# EAGLE board project_vostok_(tv_b_gone_extended) (EAGLE 8.5.0)
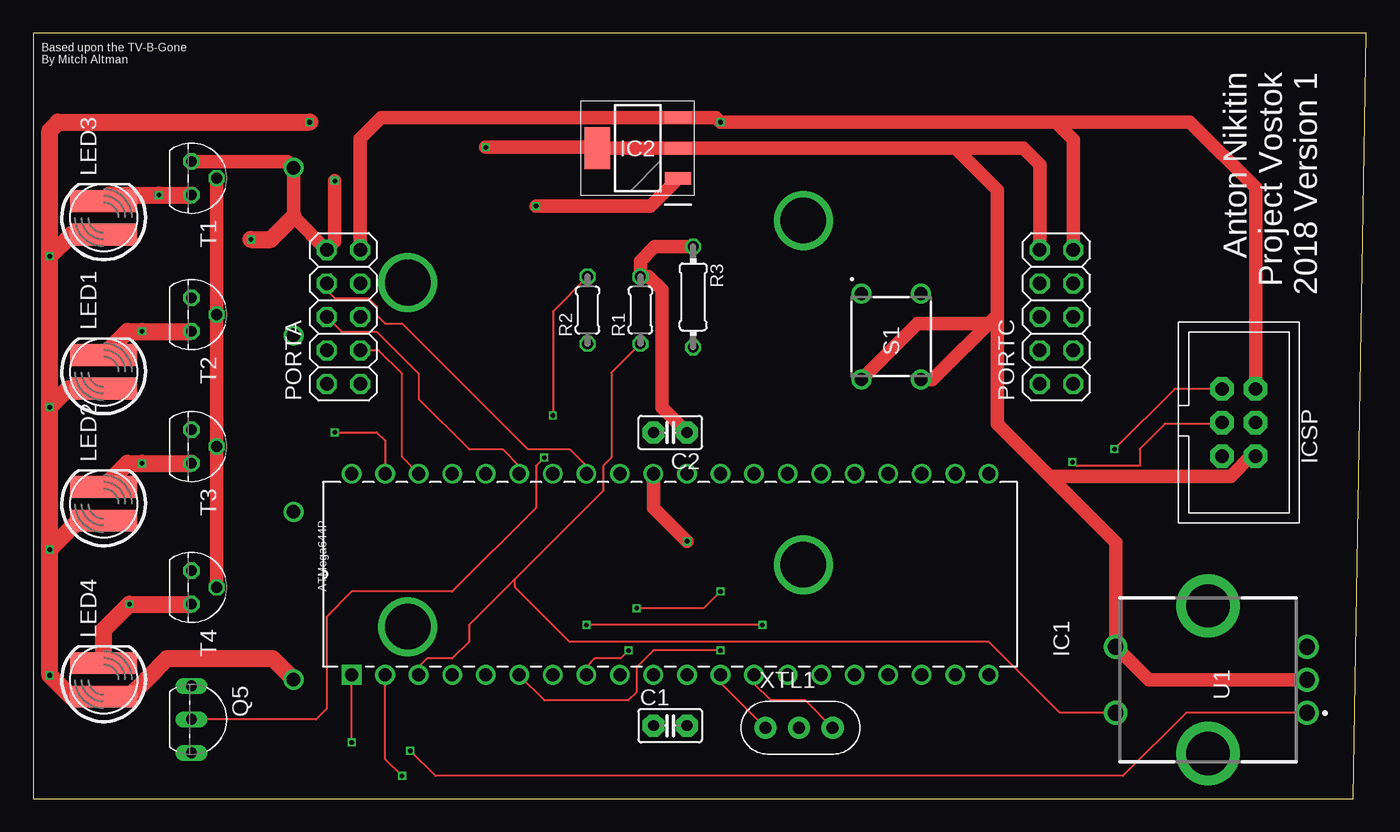
[diagram p0: board, top side]
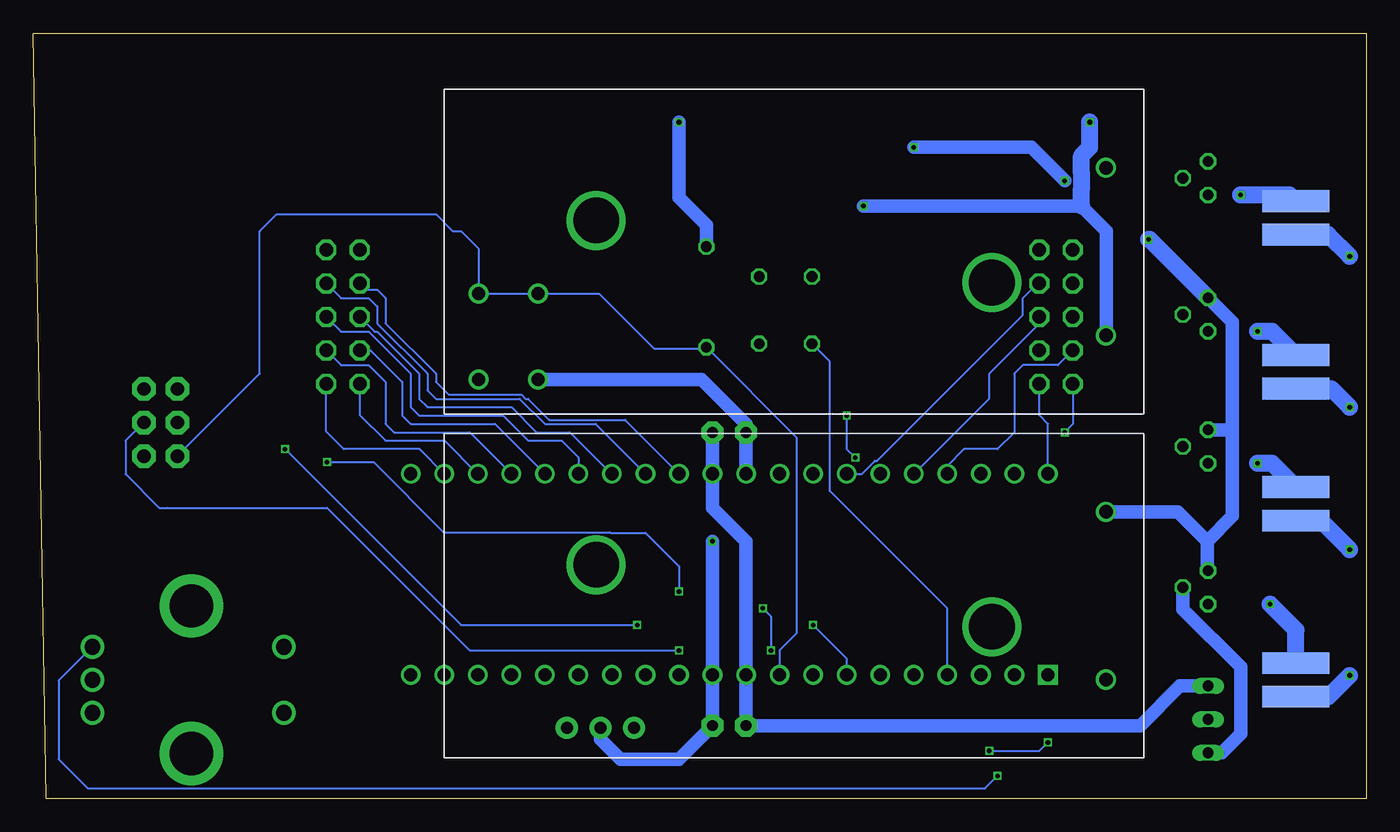
[diagram p1: board, bottom side, seen from below]

Size 101 x 58 mm. Coordinates in mm from the lower left corner, seen from the top.
Outline: 0,0 100,0 101,58 0,58 0,0
Copper layers (1*16): Top 0.035559375mm / dielectric 1.6mm / Bottom 0.035559375mm
Design rules "oshpark-2layer": minimum track width 6mil, minimum drill 10mil, track to track 6mil, track to pad 6mil, pad to pad 6mil, via to via 6mil, smd to smd 6mil, copper to edge 15mil, drill to drill 6mil, minimum pad ring 5mil, minimum via ring 5mil, stop-mask expansion 2.5mil, vias tented up to drill 0mil, thermal gap 10mil

## Footprints (pad centres in the part's own frame; a part is rotated, then mirrored left to right if it is on the bottom)
2468 = drill 1.02 pad 1.53: 1 23.625,-6.35; 2 23.625,6.35 | drill 3.45 pad 3.45: 3 -14.985,2.35; 4 14.985,-2.35
C025-025X050 = drill 0.813 pad 1.676 octagon: 1 -1.27,0; 2 1.27,0
DIP254P1524X483-40 = drill 0.991 pad 1.486 square: 1 -15.24,48.26 | drill 0.991 pad 1.486: 2 -15.24,45.72; 3 -15.24,43.18; 4 -15.24,40.64; 5 -15.24,38.1; 6 -15.24,35.56; 7 -15.24,33.02; 8 -15.24,30.48; 9 -15.24,27.94; 10 -15.24,25.4; 11 -15.24,22.86; 12 -15.24,20.32; 13 -15.24,17.78; 14 -15.24,15.24; 15 -15.24,12.7; 16 -15.24,10.16; 17 -15.24,7.62; 18 -15.24,5.08; 19 -15.24,2.54; 20 -15.24,0; 21 0,0; 22 0,2.54; 23 0,5.08; 24 0,7.62; 25 0,10.16; 26 0,12.7; 27 0,15.24; 28 0,17.78; 29 0,20.32; 30 0,22.86; 31 0,25.4; 32 0,27.94; 33 0,30.48; 34 0,33.02; 35 0,35.56; 36 0,38.1; 37 0,40.64; 38 0,43.18; 39 0,45.72; 40 0,48.26
SOT230P700X180-4N = smd 1.95 x 0.95: 1 -3.05,2.3; 2 -3.05,0; 3 -3.05,-2.3 | smd 1.95 x 3.2: 4 3.05,0
ISP6 = drill 1.016 pad 1.778 octagon: 1 -2.54,-1.27; 2 -2.54,1.27; 3 0,-1.27; 4 0,1.27; 5 2.54,-1.27; 6 2.54,1.27
5MM-SIDE = smd 1.651 x 5.08: A -1.27,0; K 1.27,0 | smd 1.651 x 5.08 bottom: A2 -1.27,0; K2 1.27,0
2X05 = drill 1.016 octagon: 1 -5.08,-1.27; 2 -5.08,1.27; 3 -2.54,-1.27; 4 -2.54,1.27; 5 0,-1.27; 6 0,1.27; 7 2.54,-1.27; 8 2.54,1.27; 9 5.08,-1.27; 10 5.08,1.27
TO92-CBE = drill 0.813 long: B 0,0; C 2.54,0; E -2.54,0
0204/5 = drill 0.813 octagon: 1 -2.54,0; 2 2.54,0
0204/7 = drill 0.813 octagon: 1 -3.81,0; 2 3.81,0
1825910-6 = drill 1 pad 1.5: 1 3.25,2.25; 2 3.25,-2.25; 3 -3.25,2.25; 4 -3.25,-2.25
TO92 = drill 0.813 octagon: 1 1.27,0; 2 0,1.905; 3 -1.27,0
PEC12R-4XXXF-SXXXX_1 = drill 1.2 pad 1.8: 1 -2.5,-7.5; 2 2.5,-7.5; 3 0,-7.5; 4 -2.5,7; 5 2.5,7 | drill 3.28 pad 4.8: 6 5.6,0; 7 -5.6,0
CERM_OSC = drill 0.9 pad 1.676: P$1 -2.54,0; P$2 0,0; P$3 2.54,0

## Placement (x,y rotation side)
BAT_1  2468  [2468]  43.36,41.44 0 bottom
BAT_2  2468  [2468]  43.36,15.37 0 bottom
C1  100nF  [C025-025X050]  48.26,5.53 0 top
C2  100nF  [C025-025X050]  48.26,27.73 180 top
IC1  ATMEGA644PV-10PU  [DIP254P1524X483-40]  72.39,24.61 90 top
IC2  MCP1825S-3302E_DB  [SOT230P700X180-4N]  45.8,49.27 180 top
ICSP  PINHD-2X3THM  [ISP6]  91.33,28.49 270 top
LED1  LED  [5MM-SIDE]  5.35,32.33 90 top
LED2  LED  [5MM-SIDE]  5.35,22.33 90 top
LED3  LED  [5MM-SIDE]  5.35,44 90 top
LED4  LED  [5MM-SIDE]  5.35,9 90 top
PORTA  [2X05]  23.52,36.49 90 top
PORTC  [2X05]  77.52,36.49 90 top
Q5  MPS2907A  [TO92-CBE]  12,6 270 top
R1  [0204/5]  46,37 90 top
R2  [0204/5]  42,37 90 top
R3  [0204/7]  50,38 270 top
S1  1825910-6  [1825910-6]  65,35 90 top
T1  2N3904  [TO92]  12,47 270 top
T2  2N3904  [TO92]  12,36.67 270 top
T3  2N3904  [TO92]  12,26.67 270 top
T4  2N3904  [TO92]  12,16 270 top
U1  PEC11R-4015F-S0024  [PEC12R-4XXXF-SXXXX_1]  89,9 90 top
XTL1  8.0MHz  [CERM_OSC]  58.02,5.37 0 top

## Library data of the parts
BAT_1 BAT_2 = SamacSys_Parts; ALLIED_NUMBER: 70182756; DESCRIPTION: Cylindrical Battery Contacts, Clips, Holders & Springs 2AAA PC MNT HOLDER; HEIGHT: mm; MANUFACTURER_NAME: Keystone Electronics; MANUFACTURER_PART_NUMBER: 2468; RS_PART_NUMBER: 2794965; SUPPLIER_NAME: RS
C1 C2 = rcl-ez
IC1 = SamacSys_Parts; DESCRIPTION: 8-bit Microcontroller with In-System Programmable Flash; HEIGHT: mm; MANUFACTURER_NAME: Microchip; MANUFACTURER_PART_NUMBER: ATMEGA644PV-10PU; RS_PART_NUMBER: 7380491P; SUPPLIER_NAME: RS
IC2 = SamacSys_Parts; ALLIED_NUMBER: 70046538; DESCRIPTION: LDO Regulator 500mA 3.3V SOT223-3 Microchip MCP1825S-3302E/DB, LDO Voltage Regulator, 0.5A, 3.3 V 0.5%, 2.1 6 Vin, 4-Pin SOT-223; HEIGHT: 1.8mm; MANUFACTURER_NAME: Microchip; MANUFACTURER_PART_NUMBER: MCP1825S-3302E/DB; RS_PART_NUMBER: 9115520; SUPPLIER_NAME: RS
ICSP = adaprog
LED1-LED4 = tvbgone
PORTA PORTC = pinhead
Q5 = transistor-pnp
R1 R2 = resistor
R3 = rcl; SPICEPREFIX: R
S1 = SamacSys_Parts; DESCRIPTION: TE CONNECTIVITY / ALCOSWITCH - 1825910-6 - TACT SWITCH, SPST, 0.05A, 24VDC, SOLDER; HEIGHT: mm; MANUFACTURER_NAME: TE Connectivity; MANUFACTURER_PART_NUMBER: 1825910-6; RS_PART_NUMBER: 1613779; SUPPLIER_NAME: RS
T1-T4 = transistor
U1 = SamacSys_Parts; DESCRIPTION: Bourns 24 Pulse Incremental Mechanical Rotary Encoder with a 6 mm Flat Shaft (Not Indexed), Through Hole; HEIGHT: mm; MANUFACTURER_NAME: Bourns; MANUFACTURER_PART_NUMBER: PEC11R-4015F-S0024; RS_PART_NUMBER: 7377739P; SUPPLIER_NAME: RS
XTL1 = digg

## Nets
GND: BAT_1.2 BAT_2.2 C1.2 C2.2 IC1.11 IC1.31 IC2.2 IC2.4 ICSP.6 PORTA.10 PORTC.10 S1.3 S1.4 T1.3 T2.3 T3.3 T4.3 U1.3 U1.5 XTL1.P$2
MISO: IC1.7 ICSP.1
MOSI: IC1.6 ICSP.4
N$7: Q5.B R2.2
N$10: IC1.5
N$11: IC1.14
N$12: IC1.15
N$13: IC1.16
N$14: IC1.17
N$15: IC1.18
N$16: IC1.19
N$17: IC1.20
N$18: IC1.32
N$19: IC1.21
PA0: IC1.40 PORTA.1
PA1: IC1.39 PORTA.2
PA2: IC1.38 PORTA.3
PA3: IC1.37 PORTA.4
PA4: IC1.36 PORTA.5
PA5: IC1.35 PORTA.6
PA6: IC1.34 PORTA.7
PA7: IC1.33 PORTA.8
PB0: IC1.1 U1.1
PB1: IC1.2 U1.2
PB2: IC1.3 R1.1 U1.4
PB3: IC1.4 R2.1
PC0: IC1.22 PORTC.1
PC1: IC1.23 PORTC.2
PC2: IC1.24 PORTC.3
PC3: IC1.25 PORTC.4
PC4: IC1.26 PORTC.5
PC5: IC1.27 PORTC.6
PC6: IC1.28 PORTC.7
PC7: IC1.29 PORTC.8
Q5_E: Q5.C T1.2 T2.2 T3.2 T4.2
RESET: IC1.9 ICSP.5 R3.2 S1.1 S1.2
SCK: IC1.8 ICSP.3
T1_C: LED3.K LED3.K2 T1.1
T2_C: LED1.K LED1.K2 T2.1
T3_C: LED2.K LED2.K2 T3.1
T4_C: LED4.K LED4.K2 T4.1
VIN_REG: BAT_1.1 BAT_2.1 IC2.1 LED1.A LED1.A2 LED2.A LED2.A2 LED3.A LED3.A2 LED4.A LED4.A2
VOUT_REG: C1.1 C2.1 IC1.10 IC1.30 IC2.3 ICSP.2 PORTA.9 PORTC.9 Q5.E R1.2 R3.1
XTAL1: IC1.13 XTL1.P$3
XTAL2: IC1.12 XTL1.P$1

## Tracks (layer width: path | path; a pad name or v marks a point on that pad's centre or on a via)
GND  (via drill 0.35)
  Top 1.016: v22.86,46.8 22.86,42.18 PORTA.10 19.73,44.09 BAT_1.2 19.25,48.27 T1.3 | v34.29,49.34 42.67,49.34 IC2.4 IC2.2 69.85,49.27 | IC1.31 46.99,22.04 v49.53,19.5 | 69.85,49.27 75,49.27 76.25,48.02 PORTC.10 | ICSP.6 92.26,25.95 90.71,24.4 77.01,24.4 | 77.01,24.4 73.03,28.38 73.03,36.01 | 73.03,36.01 73.03,36.64 | 73.03,36.64 73.03,46.09 69.85,49.27 | S1.4 68.14,31.75 73.03,36.64 | S1.3 67,36.01 73.03,36.01 | 77.01,24.4 82,19.41 U1.5 84.5,9 U1.3
  Top 1.27: v16.51,42.35 18,42.35 19.73,44.09
  Bottom 1.016: v22.86,46.8 25.4,49.34 v34.29,49.34 | IC1.31 C2.2 46.99,28.38 50.35,31.75 S1.3 | v49.53,19.5 IC1.11 C1.2 52.07,2.99 56.52,2.99 58.02,4.49 XTL1.P$2 | T4.3 12.06,17.34 12.06,19.5 | 12.06,19.5 14.29,21.72 BAT_2.2 | T3.3 10.35,27.94 10.16,27.75 | 10.16,27.75 10.16,21.4 12.06,19.5 | T2.3 10.16,36.1 10.16,27.75
  Bottom 1.27: T2.3 16.41,42.35 v16.51,42.35
MISO  (via drill 0.35)
  Top 0.152: ICSP.1 86.47,31.03 v81.92,26.48 | v55.24,13.14 v41.91,13.14
  Bottom 0.152: v81.92,26.48 68.58,13.14 v55.24,13.14 | IC1.7 39.37,10.61 v41.91,13.14
MOSI  (via drill 0.35)
  Top 0.152: v52.07,11.22 47.01,11.22 | 47.01,11.22 46.99,11.24 | 47.01,11.22 45.72,9.93 45.72,8.06 45.09,7.43 38.73,7.43 36.83,9.34 IC1.6
  Bottom 0.152: ICSP.4 93.98,27.11 93.98,24.57 91.44,22.04 90.81,22.04 78.74,22.04 67.92,11.22 v52.07,11.22
N$7  (via drill 0.35)
  Top 0.152: R2.2 39.37,36.91 v39.37,29.02 | v38.71,25.82 38.1,25.21 38.1,22.04 31.75,15.68 24.13,15.68 22.23,13.78 22.23,6.79 21.43,6 Q5.B
  Bottom 0.152: v39.37,29.02 39.37,26.48 v38.71,25.82
PA0
  Bottom 0.152: IC1.40 24.13,28.38 24.79,29.05 PORTA.1
PA1  (via drill 0.35)
  Top 0.152: v22.86,27.75 26.04,27.75 26.67,27.11 IC1.39
  Bottom 0.152: PORTA.2 22.25,28.36 v22.86,27.75
PA2
  Top 0.152: IC1.38 27.94,25.88 27.94,32.2 26.18,33.95 PORTA.3
PA3
  Bottom 0.152: PORTA.4 23.37,32.83 26.04,32.83 26.67,32.2 26.67,27.75 27.94,26.48 30.48,26.48 31.75,25.21 IC1.37
PA4
  Bottom 0.152: IC1.36 28.57,30.33 28.57,32.2 24.79,35.98 PORTA.5
PA5
  Top 0.152: PORTA.6 23.37,35.37 26.04,35.37 29.21,32.2 29.21,30.29 33.02,26.48 35.56,26.48 36.83,25.21 IC1.35
PA6
  Bottom 0.152: IC1.34 38.2,24.61 37.23,25.58 37.09,25.58 26.04,36.64 26.04,37.91 24.91,39.03 PORTA.7
PA7
  Top 0.152: PORTA.8 22.25,38.52 22.86,37.91 25.4,37.91 26.04,37.27 26.04,36.64 26.67,36.01 27.94,36.01 37.47,26.48 40.64,26.48 41.91,25.21 IC1.33
PB0  (via drill 0.35)
  Top 0.152: U1.1 87.33,6.5 82.55,1.71 30.48,1.71 v28.57,3.62 | v24.13,4.26 IC1.1
  Bottom 0.152: v28.57,3.62 24.77,3.62 v24.13,4.26
PB1  (via drill 0.35)
  Top 0.152: v27.94,1.71 26.67,2.99 IC1.2
  Bottom 0.152: U1.2 99.06,8.94 99.06,2.99 96.85,0.77 28.88,0.77 v27.94,1.71
PB2
  Top 0.152: R1.1 43.81,32.27 43.81,25.84 43.18,25.21 43.18,23.3 36.51,16.64 | 36.51,16.64 33.02,13.14 33.02,11.88 31.75,10.61 29.84,10.61 29.21,9.97 IC1.3 | U1.4 77.77,6.5 72.39,11.88 40.64,11.88 36.51,16 36.51,16.64
PB3
  Bottom 0.152: IC1.4 31.75,14.41 40.64,23.3 40.64,33.1 R2.1
PC0
  Bottom 0.152: IC1.22 71.72,26.48 77.47,26.48 78.79,27.8 PORTC.1
PC1
  Bottom 0.152: PORTC.2 76.25,29.07 74.3,27.11 69.81,27.11 IC1.23
PC2
  Bottom 0.152: PORTC.3 77.67,32.83 75.56,32.83 74.3,31.56 74.3,28.38 73.66,27.75 67.91,27.75 IC1.24
PC3
  Bottom 0.152: PORTC.4 75.42,33.95 73.03,31.56 73.03,29.02 72.39,28.38 66,28.38 IC1.25
PC4
  Bottom 0.152: PORTC.5 77.67,35.37 75.56,35.37 72.39,32.2 72.39,29.66 71.75,29.02 65.41,29.02 63.5,27.11 60.96,27.11 59.69,25.84 IC1.26
PC5
  Bottom 0.152: PORTC.6 75.13,35.37 74.93,35.37 71.75,32.2 71.75,30.29 71.12,29.66 64.77,29.66 62.87,27.75 60.33,27.75 57.19,24.61 IC1.27
PC6
  Bottom 0.152: PORTC.7 77.67,37.91 75.56,37.91 74.93,37.27 74.93,36.01 71.12,32.2 71.12,30.92 70.48,30.29 64.14,30.29 62.23,28.38 58.38,28.38 IC1.28
PC7
  Bottom 0.152: PORTC.8 75.77,38.55 74.93,38.55 74.3,37.91 74.3,36.01 70.48,32.2 70.48,31.56 69.52,30.59 64.01,30.59 63.7,30.29 63.5,30.29 61.9,28.69 56.15,28.69 IC1.29
Q5_E
  Top 1.016: T4.2 T3.2 T2.2 T1.2
  Bottom 1.016: T4.2 13.9,14.35 9.53,9.97 9.53,4.89 10.96,3.46 Q5.C
RESET
  Bottom 0.152: IC1.9 44.45,11.24 43.18,12.51 43.18,27.37 R3.2 50.09,34.1 53.98,34.1 58.12,38.25 S1.1 S1.2 67.25,41.66 68.58,42.99 69.22,42.99 70.48,44.26 82.55,44.26 83.82,42.99 83.82,32.2 ICSP.5
SCK  (via drill 0.35)
  Top 0.152: ICSP.3 89.96,28.38 85.72,28.38 83.82,26.48 83.82,25.21 79.02,25.21 v78.74,25.49 | v52.07,15.68 50.8,14.41 v45.72,14.41 | v45.11,11.22 44.49,10.61 42.55,10.61 41.91,9.97 IC1.8
  Bottom 0.152: v78.74,25.49 75.21,25.49 69.9,20.18 57.33,20.18 57.27,20.13 54.61,20.13 52.07,17.59 v52.07,15.68 | v45.72,14.41 45.11,13.8 v45.11,11.22
T1_C  (via drill 0.35)
  Top 1.27: LED3.K2 5.81,45.73 v9.53,45.73 T1.1
  Bottom 1.27: LED3.K2 5.81,45.73 v9.53,45.73
T2_C  (via drill 0.35)
  Top 1.27: LED1.K2 7.15,35.4 v8.26,35.4 T2.1
  Bottom 1.27: LED1.K2 7.15,35.4 v8.26,35.4
T3_C  (via drill 0.35)
  Top 1.27: LED2.K2 7.15,25.4 v8.26,25.4 T3.1
  Bottom 1.27: LED2.K2 7.15,25.4 v8.26,25.4
T4_C  (via drill 0.35)
  Top 1.27: LED4.K2 5.35,12.78 v7.3,14.73 T4.1
  Bottom 1.27: LED4.K2 5.35,12.78 v7.3,14.73
VIN_REG  (via drill 0.35)
  Top 1.016: IC2.1 46.77,44.9 v38.1,44.9
  Top 1.27: v1.27,18.86 v1.27,9.34 2.88,7.73 LED4.A2 7.29,7.73 8.68,9.12 10.16,10.61 18.15,10.61 BAT_2.1 | v1.27,18.86 3.47,21.06 LED2.A2 | v1.27,18.86 v1.27,29.66 | v1.27,29.66 2.67,31.06 LED1.A2 | v1.27,29.66 v1.27,41.09 | v1.27,41.09 2.92,42.73 LED3.A2 | v1.27,41.09 1.27,50.61 1.91,51.24 v20.95,51.24
  Bottom 1.016: v38.1,44.9 21.59,44.9 19.68,42.99 19.68,35.14 BAT_1.1
  Bottom 1.27: 21.59,44.9 21.59,46.24 21.57,46.26 21.57,47.34 21.59,47.36 21.59,48.7 20.95,49.34 v20.95,51.24 | LED4.A2 2.88,7.73 v1.27,9.34 | LED2.A2 3.47,21.06 v1.27,18.86 | LED1.A2 2.67,31.06 v1.27,29.66 | LED3.A2 2.92,42.73 v1.27,41.09
VOUT_REG  (via drill 0.35)
  Top 1.016: PORTA.9 24.79,50 26.36,51.57 IC2.3 51.74,51.57 v52.07,51.24 77.47,51.24 | R3.1 47.08,41.81 46,40.73 R1.2 46.63,39.54 47.62,38.55 47.62,29.63 C2.1 | PORTC.9 78.79,49.92 77.47,51.24 | ICSP.2 92.61,46.27 87.63,51.24 77.47,51.24
  Bottom 1.016: C2.1 IC1.30 49.53,22.04 46.99,19.5 IC1.10 C1.1 17.14,5.53 14.13,8.54 Q5.E | v52.07,51.24 52.07,45.53 50,43.46 R3.1
XTAL1
  Top 0.152: XTL1.P$3 58.5,7.43 55.88,7.43 54.61,8.7 IC1.13
XTAL2
  Top 0.152: XTL1.P$1 52.07,8.78 IC1.12

## Text on the board
tNames: Based upon the TV-B-Gone / By Mitch Altman | Anton Nikitin / Project Vostok / 2018 Version 1 | ATMega644P